# Altium PCB 20K Control Board V1.1.PcbDoc (part 20 of 24)
Units mm, origin at the board's own origin, x right, y up, seen from the top; angles counter-clockwise.
Board outline 132 x 260 mm, 4 copper layers (Top Layer, GND, VCC, Bottom Layer); 1384 components, 779 nets, 4515 pads, 1774 vias.
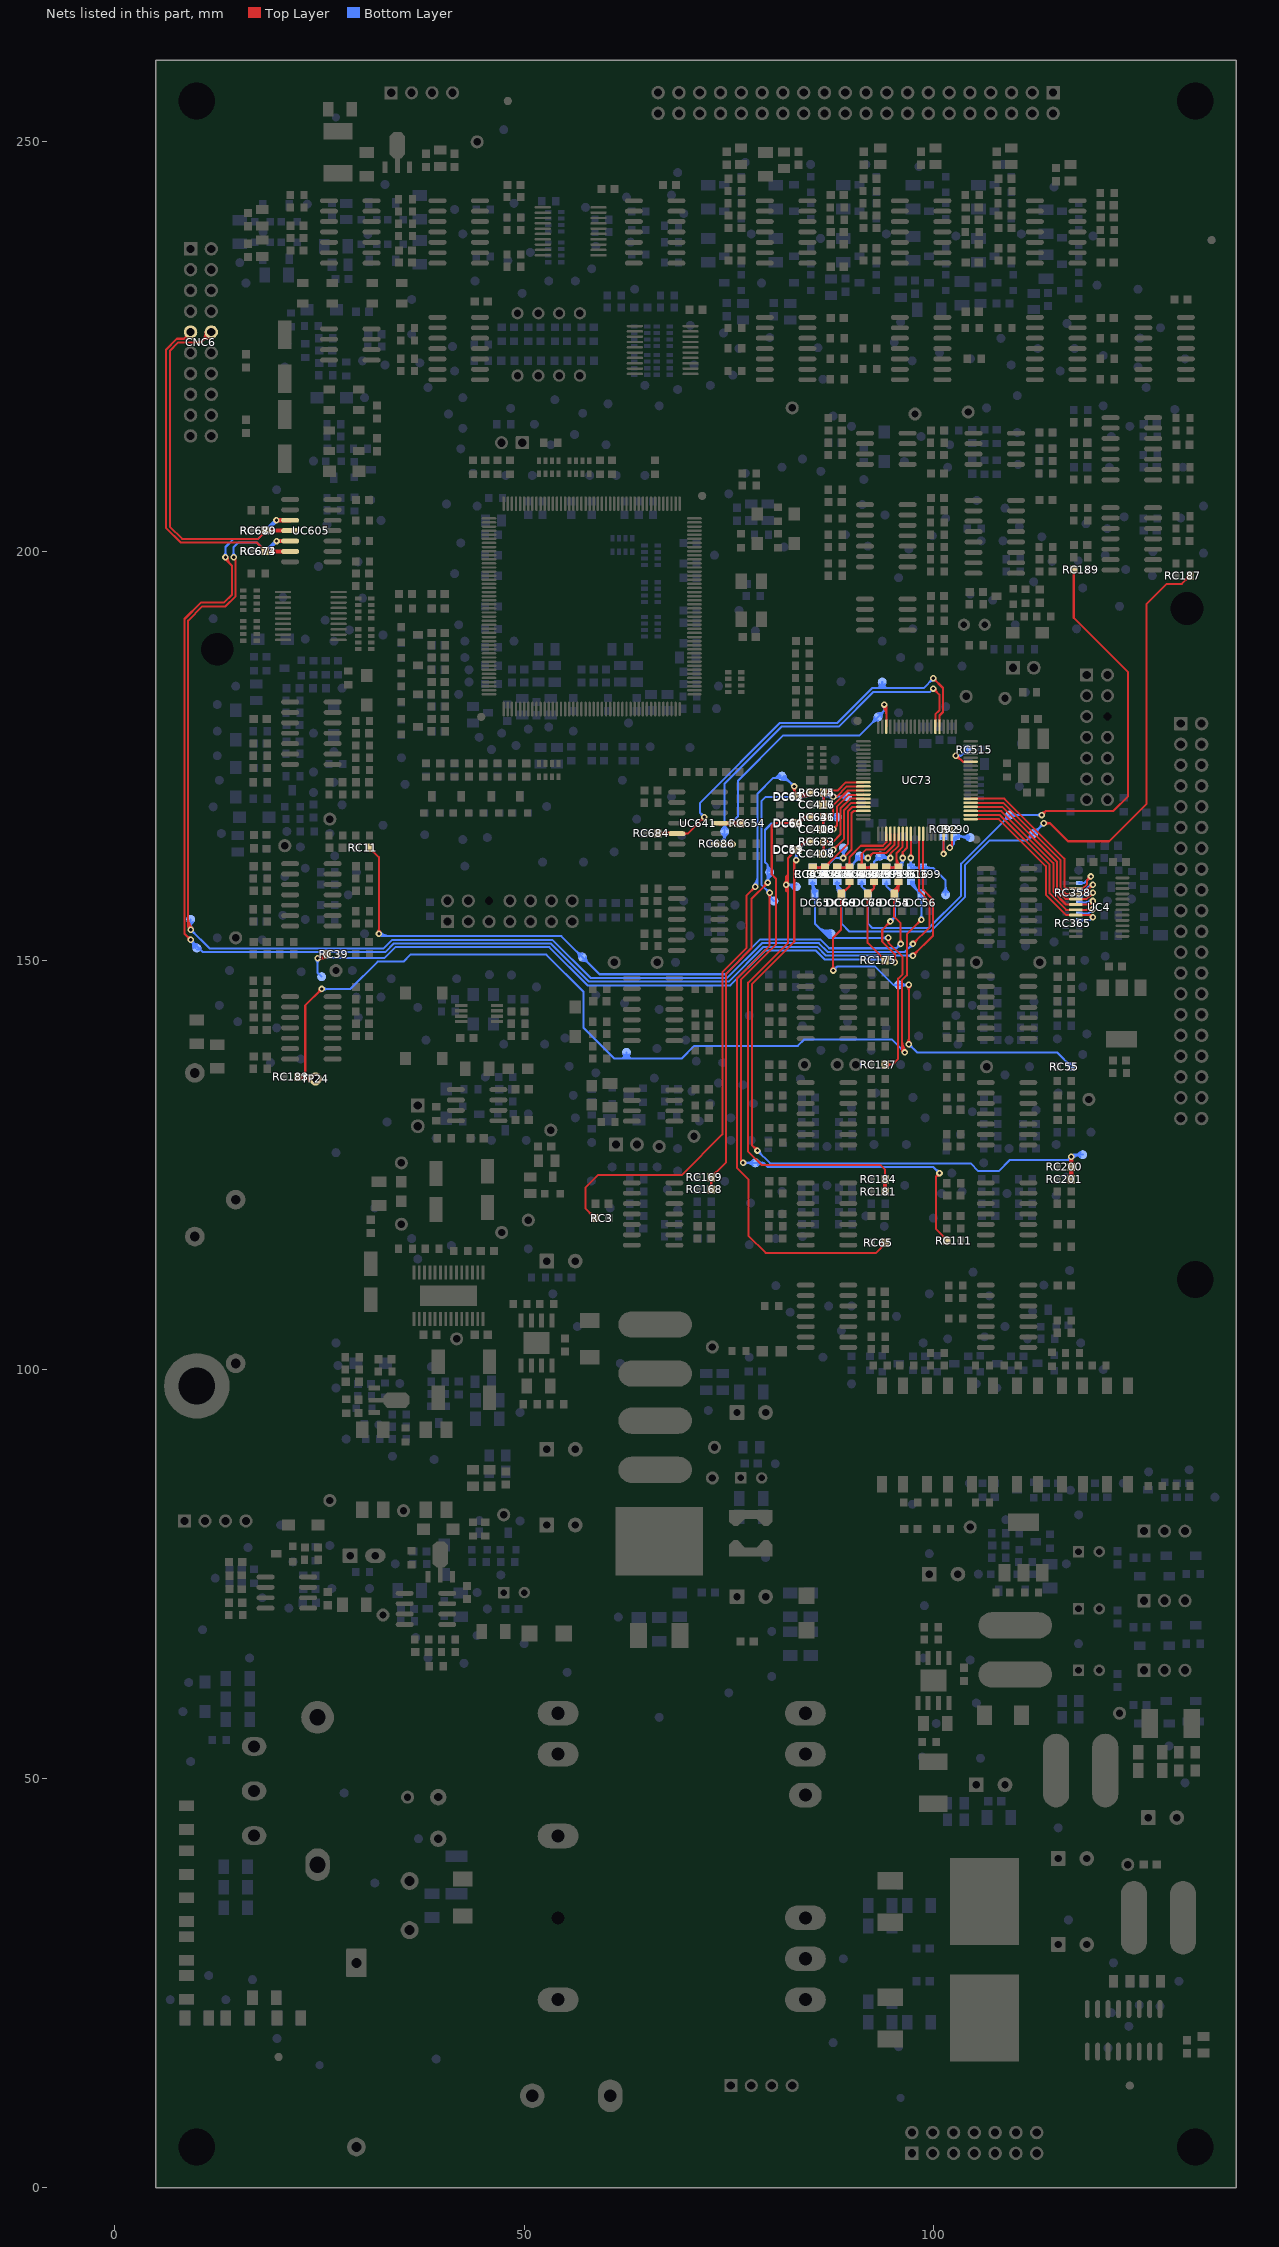
[diagram p22: the nets of this part, all layers, seen from the top]

## Via types
v1: diameter 0.8, hole 0.4, Top Layer to Bottom Layer, tented both sides, 1354 vias
v2: diameter 1.2, hole 0.7, Top Layer to Bottom Layer, 261 vias
v3: diameter 0.8, hole 0.4, Top Layer to Bottom Layer, 58 vias
v4: diameter 1.2, hole 0.7, Top Layer to Bottom Layer, tented top, 58 vias
v5: diameter 0.8, hole 0.4, Top Layer to Bottom Layer, tented top, 22 vias
v6: diameter 1.2, hole 0.7, Top Layer to Bottom Layer, tented both sides, 13 vias
v7: diameter 1.2, hole 0.7, Top Layer to Bottom Layer, tented bottom, 8 vias

## Nets (pads, with @x,y where several pads share a name; then routed paths per layer and width w, separated by ;. In a path a pad name is that pad's centre, name@x,y a point inside that pad or via, vN(x,y) a via of type N, cw(c..) or ccw(c..) an arc to the next point about the centre after c; other vN are vias at no path point) (continued)
S.DCI-R.AD: CC421.2 RC655.2 UC73.17 | length 15.5
  Top Layer w0.25: CC421.2@85.25,161.35 86.7,161.35 89.55,164.2 89.55,168.186 90.114,168.75 UC73.17@91.45,168.75 ; CC421.2@85.515,161.035 cw(c86.276,160.274) RC655.2@86.276,161.35 ; CC421.2@85.515,161.565 ccw(c86.035,162.085) 86.035,161.35 ; RC655.2@86.47,161.12 ccw(c85.915,160.565) 85.915,161.35 ccw(c85.915,162.135) RC655.2@86.47,161.58 ; RC655.2@86.8,161.675 ccw(c86.8,162.218) 87.184,161.834 ; RC655.2@87.125,161.35 cw(c88.151,161.35) 87.426,162.076
S.DCI-S: DC65.3 pad.ICT@87.5,153.25 RC137.1 RC656.1 | length 45.3
  Top Layer w0.25: RC137.1@94.1,137.35 RC137.1@94.1,137.25 95,137.25 95.7,137.95 95.7,147.75 96.25,148.3 96.25,150.421 94.5,152.171 ; v1@94.326,152.537 cw(c94.028,152.171) 94.5,152.171 ; RC137.1@94.33,137.02 cw(c94.885,136.465) 94.885,137.25 cw(c94.885,138.035) RC137.1@94.33,137.48 ; v1(94.5,152.75) 94.5,152.171 ; v1@94.674,152.537 ccw(c94.972,152.171) 94.5,152.171
  Bottom Layer w0.25: RC656.1@85.02,159.42 cw(c84.465,158.865) 85.25,158.865 cw(c86.035,158.865) RC656.1@85.48,159.42 ; 85.25,159.066 ccw(c86.351,159.066) DC65.3@85.592,158.269 ; DC65.3@85.3,157.619 cw(c84.733,157.052) 85.535,157.052 cw(c86.337,157.052) DC65.3@85.77,157.619 ; DC65.3@85.764,158.45 cw(c86.907,159.65) RC656.1@85.25,159.65 85.25,158.317 DC65.3@85.535,158.032 85.535,154.465 87.25,152.75 v1(94.5,152.75) ; 85.91,154.09 ccw(c87.04,155.22) pad.ICT@87.403,153.664 ; 86.228,153.772 ccw(c87.16,154.705) pad.ICT@87.46,153.42 ; 86.546,153.454 ccw(c87.281,154.189) pad.ICT@87.517,153.177 ; 86.864,153.136 ccw(c87.401,153.673) pad.ICT@87.574,152.934 ; v1@94.306,152.556 ccw(c93.836,152.086) 93.836,152.75 ccw(c93.836,153.414) v1@94.306,152.944
S.DCI-S.AD: CC422.2 pad.ICT@89,163.75 RC656.2 UC73.18 | length 20.7
  Top Layer w0.25: v1(89,162.5) 90,163.5 90,168 90.25,168.25 UC73.18@91.45,168.25
  Bottom Layer w0.25: RC656.2@85.3,161.3 CC422.2@86.75,161.3 87.95,162.5 v1(89,162.5) pad.ICT@89,163.75 ; RC656.2@85.53,161.12 cw(c85.964,160.686) 85.964,161.3 ; RC656.2@85.53,161.58 ccw(c86.205,162.255) 86.205,161.3 ; CC422.2@86.485,161.035 ccw(c85.845,160.395) 85.845,161.3 ccw(c85.845,162.205) CC422.2@86.485,161.565 ; CC422.2@86.75,161.675 ccw(c86.75,162.58) 87.39,161.94 ccw(c88.03,161.3) CC422.2@87.125,161.3 ; pad.ICT@88.699,163.449 cw(c87.974,162.724) 89,162.724 cw(c90.026,162.724) pad.ICT@89.301,163.449 ; v1@88.806,162.306 ccw(c88.336,161.836) 88.336,162.5 ccw(c88.336,163.164) 88.806,162.694 ccw(c88.336,163.164) 89,163.164 ccw(c89.664,163.164) v1@89.194,162.694
S.DCI-T: DC66.3 pad.ICT@95.75,147 RC55.1 RC657.1 | length 63.2
  Top Layer w0.25: v1@87.556,148.944 ccw(c87.086,149.414) 87.75,149.414 ccw(c88.414,149.414) v1@87.944,148.944 ; v1(87.75,148.75) 87.75,152.785 88.715,153.75 DC66.3@88.715,158.032 89.75,159.067 ; DC66.3@88.48,157.619 cw(c87.913,157.052) 88.715,157.052 cw(c89.517,157.052) DC66.3@88.95,157.619 ; DC66.3@88.715,158.292 ccw(c88.715,158.92) DC66.3@89.159,158.476 ; DC66.3@88.715,158.542 ccw(c88.715,159.773) 89.586,158.903 ; DC66.3@89.047,158.21 cw(c89.42,158.21) DC66.3@89.157,158.473 ; RC657.1@89.579,159.374 cw(c89.389,159.067) 89.75,159.067 ; RC657.1@89.75,159.65 89.75,159.067 ; RC657.1@89.921,159.374 ccw(c90.111,159.067) 89.75,159.067 ; v1@96.806,139.944 ccw(c96.336,140.414) 97,140.414 ccw(c97.664,140.414) v1@97.194,139.944 ; v1@96.806,146.806 cw(c96.336,146.336) 97,146.336 cw(c97.664,146.336) v1@97.194,146.806 ; v1(97,139.75) v1(97,147)
  Bottom Layer w0.25: v1(87.75,148.75) 88.225,149.225 92.889,149.225 95.114,147 pad.ICT@95.75,147 v1(97,147) ; v1@87.75,149.025 ccw(c87.75,149.689) 88.219,149.219 ccw(c88.689,148.75) v1@88.025,148.75 ; pad.ICT@96.051,146.699 cw(c96.776,145.974) 96.776,147 cw(c96.776,148.026) pad.ICT@96.051,147.301 ; v1@96.806,146.806 ccw(c96.336,146.336) 96.336,147 ccw(c96.336,147.664) v1@96.806,147.194 ; v1@97,139.475 cw(c97,138.811) 97.469,139.281 cw(c97.939,139.75) v1@97.275,139.75 ; v1(97,139.75) 98,138.75 115.1,138.75 RC55.1@116.85,137 ; 116.21,137.64 ccw(c116.85,138.28) RC55.1@116.85,137.375 ; 116.331,137.519 cw(c115.861,137.05) RC55.1@116.525,137.05
S.DCI-T.AD: CC423.2 RC657.2 UC73.23 | length 13
  Top Layer w0.25: CC423.2@88.25,161.3 RC657.2@89.7,161.3 ; CC423.2@88.515,161.035 cw(c89.155,160.395) 89.155,161.3 cw(c89.155,162.205) CC423.2@88.515,161.565 ; 88.795,161.3 ccw(c88.795,162.255) RC657.2@89.47,161.58 ; 89.036,161.3 cw(c89.036,160.686) RC657.2@89.47,161.12 ; RC657.2@89.52,161.58 ccw(c88.965,162.135) 89.75,162.135 ccw(c90.535,162.135) RC657.2@89.98,161.58 ; RC657.2@89.7,161.35 RC657.2@89.7,161.3 ; UC73.23@94.25,165.45 94.25,164.412 93.838,164 92.75,164 91.136,164 89.75,162.614 RC657.2@89.75,161.35 RC657.2@89.7,161.3
S.DSP_RDY: pad.ICT@93.25,179.75 RC654.2 UC73.78 UC641.11 | length 41.2
  Top Layer w0.25: v1@93.806,181.056 cw(c92.733,179.983) 94.25,179.983 ; v1@93.982,181.232 cw(c93.336,180.586) 94.25,180.586 ; v1(94,181.25) 94.25,181 UC73.78@94.25,178.55
  Top Layer w0.5: UC641.11@73.85,166.75 76.15,166.75 RC654.2@76.4,166.5 ; RC654.2@76.259,166.609 ccw(c75.917,166.267) 75.917,166.75 ccw(c75.917,167.233) RC654.2@76.259,166.891
  Bottom Layer w0.25: v1(75.25,166.75) 76.125,167.625 76.125,171.963 81.612,177.45 90.95,177.45 94,180.5 v1(94,181.25) ; v1@75.25,167.025 ccw(c75.25,167.689) 75.719,167.219 ccw(c76.189,166.75) v1@75.525,166.75 ; pad.ICT@92.825,179.75 cw(c91.799,179.75) 92.524,179.024 cw(c93.25,178.299) pad.ICT@93.25,179.325 ; pad.ICT@93.25,180.175 ccw(c93.25,181.201) 93.976,180.476 ccw(c94.701,179.75) pad.ICT@93.675,179.75 ; v1@93.806,181.056 cw(c93.336,180.586) 94,180.586 cw(c94.664,180.586) v1@94.194,181.056
S.FAN.ST5: RC92.1 UC73.37 | length 8
  Top Layer w0.25: v1@101.056,163.194 ccw(c100.586,163.664) 101.25,163.664 ccw(c101.914,163.664) v1@101.444,163.194 ; v1(101.25,163) UC73.37@101.25,165.45
  Bottom Layer w0.25: RC92.1@101.02,164.92 cw(c100.465,164.365) 101.25,164.365 cw(c102.035,164.365) RC92.1@101.48,164.92 ; v1@101.056,163.194 ccw(c100.586,163.664) 101.25,163.664 ccw(c101.914,163.664) v1@101.444,163.194 ; v1(101.25,163) RC92.1@101.25,165.2
S.FAN.ST6: pad.ICT@104.5,165 RC90.1 UC73.39 | length 11.1
  Top Layer w0.25: v1(102,163.75) 102.25,164 UC73.39@102.25,165.45 UC73.39@102.25,165.435
  Bottom Layer w0.25: v1(102,163.75) 102.5,164.25 102.5,164.9 RC90.1@102.75,165.15 pad.ICT@104.4,165.15 ; v1@102,164.025 ccw(c102,164.689) 102.469,164.219 ccw(c102.939,163.75) v1@102.275,163.75 ; 102.5,164.228 cw(c103.247,164.228) RC90.1@102.866,164.87 ; 102.5,164.667 cw(c102.987,164.667) RC90.1@102.738,165.085 ; RC90.1@103.03,164.92 cw(c103.585,164.365) 103.585,165.15 cw(c103.585,165.935) RC90.1@103.03,165.38 ; RC90.1@103.112,165.15 cw(c103.112,163.612) pad.ICT@104.199,164.699 ; 103.715,165.15 cw(c103.715,164.215) pad.ICT@104.376,164.876 ; 103.836,165.15 ccw(c103.836,165.664) pad.ICT@104.199,165.301
S.GFCI: DC68.3 RC175.2 RC668.1 | length 16.1
  Top Layer w0.25: DC68.3@91.73,157.619 cw(c91.163,157.052) 91.965,157.052 cw(c92.767,157.052) DC68.3@92.2,157.619 ; DC68.3@91.972,158.292 ccw(c92.015,158.792) DC68.3@92.37,158.437 ; DC68.3@91.994,158.541 ccw(c92.075,159.492) 92.75,158.817 ; DC68.3@92.297,158.21 cw(c92.67,158.21) DC68.3@92.407,158.473 ; RC668.1@92.52,159.42 cw(c91.965,158.865) 92.75,158.865 cw(c93.535,158.865) RC668.1@92.98,159.42 ; RC668.1@92.75,159.65 92.75,158.817 ; 93.46,150.64 ccw(c94.1,151.28) RC175.2@94.1,150.375 ; 93.581,150.519 cw(c93.111,150.05) RC175.2@93.775,150.05 ; RC175.2@94.1,150 91.965,152.135 DC68.3@91.965,158.032 92.75,158.817
S.GFCI.AD: CC430.2 RC668.2 UC73.24 | length 12.5
  Top Layer w0.25: CC430.2@90.985,161.565 ccw(c90.345,162.205) 91.25,162.205 ccw(c92.155,162.205) 91.515,161.565 ccw(c92.035,162.085) 92.035,161.35 ; CC430.2@91.25,161.3 91.25,163 91.8,163.55 93.25,163.55 94.025,163.55 94.75,164.275 UC73.24@94.75,165.45 ; CC430.2@91.3,161.35 RC668.2@92.75,161.35 RC668.2@92.7,161.3 ; CC430.2@91.515,161.035 cw(c92.276,160.274) RC668.2@92.276,161.35 ; RC668.2@92.47,161.12 ccw(c91.915,160.565) 91.915,161.35 ccw(c91.915,162.135) RC668.2@92.47,161.58
S.RELAY-ISO1: pad.ICT@9.25,155 RC673.2 UC73.31 UC605.5 | length 180.2
  Top Layer w0.25: 8.95,154.535 ccw(c10.035,154.535) v1@9.268,153.768 ; 8.95,155.138 ccw(c10.638,155.138) v1@9.444,153.944 ; v1(9.25,153.75) 8.95,154.05 8.95,191.514 10.686,193.25 13.5,193.25 14.75,194.5 14.75,199 v1(14.5,199.25) ; v1(97.5,152) 99.5,154 99.5,157.227 98.25,158.477 UC73.31@98.25,165.45 ; v1@97.5,152.275 ccw(c97.5,152.939) 97.969,152.469 ccw(c98.439,152) v1@97.775,152
  Top Layer w0.5: v1(19.75,201.23) UC605.5@21.4,201.23
  Bottom Layer w0.25: pad.ICT@8.949,154.699 cw(c8.224,153.974) 9.25,153.974 cw(c10.276,153.974) pad.ICT@9.551,154.699 ; v1@9.056,153.944 ccw(c8.586,154.414) 9.25,154.414 ccw(c9.914,154.414) v1@9.444,153.944 ; v1@9.25,153.475 cw(c9.25,152.811) 9.719,153.281 cw(c10.189,153.75) v1@9.525,153.75 ; pad.ICT@9.25,155 v1(9.25,153.75) 11.55,151.45 32.827,151.45 33.877,152.5 53.455,152.5 58.105,147.85 74.804,147.85 79.054,152.1 85.991,152.1 87.066,151.025 96.525,151.025 v1(97.5,152) ; v1@14.306,199.444 ccw(c13.836,199.914) 14.5,199.914 ccw(c15.164,199.914) v1@14.694,199.444 ; v1(14.5,199.25) 14.5,200.5 15.05,201.05 17.3,201.05 RC673.2@18.35,200 ; 17.71,200.64 ccw(c18.35,201.28) RC673.2@18.35,200.375 ; 17.831,200.519 cw(c17.361,200.05) RC673.2@18.025,200.05 ; v1@97.225,152 cw(c96.561,152) 97.031,151.531 cw(c97.5,151.061) v1@97.5,151.725
  Bottom Layer w0.5: RC673.2@18.35,200.25 ccw(c18.35,201.264) 19.067,200.547 ; RC673.2@18.52,200 v1(19.75,201.23)
S.RELAY-ISO2: pad.ICT@10,151.5 RC679.2 UC73.32 UC605.3 | length 183.6
  Top Layer w0.25: v1@8.975,152.5 ccw(c8.311,152.5) 8.781,152.969 ccw(c9.25,153.439) v1@9.25,152.775 ; v1(9.25,152.5) 8.5,153.25 8.5,191.7 10.5,193.7 13.314,193.7 14.3,194.686 14.3,198.2 13.5,199 v1(13.5,199.25) ; v1@13.525,199.25 ccw(c14.189,199.25) 13.719,198.781 ; v1@13.775,199.25 ccw(c15.042,199.25) 14.146,198.354 ; v1(97.5,150.575) 99.95,153.025 99.95,157.414 98.75,158.614 UC73.32@98.75,165.45 ; v1@97.5,150.85 ccw(c97.5,151.514) 97.969,151.044 ccw(c98.439,150.575) v1@97.775,150.575
  Top Layer w0.5: v1(19.73,203.77) UC605.3@21.4,203.77
  Bottom Layer w0.25: v1@9.125,152.625 cw(c8.038,151.538) pad.ICT@9.575,151.508 ; v1@9.25,152.225 cw(c9.25,151.561) 9.719,152.031 cw(c10.189,152.5) v1@9.525,152.5 ; v1(9.25,152.5) 10.75,151 33.014,151 34.064,152.05 53.268,152.05 57.918,147.4 74.991,147.4 79.241,151.65 85.804,151.65 86.879,150.575 v1(97.5,150.575) ; 9.54,152.21 cw(c8.853,151.522) pad.ICT@9.825,151.503 ; 9.701,152.049 ccw(c10,152.347) pad.ICT@10,151.925 ; pad.ICT@10.043,151.33 cw(c10.176,150.8) 10.563,151.187 ; pad.ICT@10.425,151.5 ccw(c10.847,151.5) 10.549,151.201 ; v1@13.306,199.444 ccw(c12.836,199.914) 13.5,199.914 ccw(c14.164,199.914) v1@13.694,199.444 ; v1(13.5,199.25) 13.5,200.5 14.5,201.5 17.5,201.5 18.35,202.35 RC679.2@18.35,202.5 ; 17.724,201.724 ccw(c16.999,202.45) RC679.2@18.025,202.45 ; 17.966,201.966 cw(c18.35,201.582) RC679.2@18.35,202.125 ; v1@97.306,150.381 ccw(c96.836,149.911) 96.836,150.575 ccw(c96.836,151.239) v1@97.306,150.769
  Bottom Layer w0.5: RC679.2@18.35,202.75 ccw(c18.35,203.619) 18.965,203.005 ; RC679.2@18.46,202.5 v1(19.73,203.77)
S.RELAY-R1: RC365.6 UC4.8 UC73.41 | length 25.4
  Top Layer w0.25: UC73.41@104.55,167.25 108,167.25 113.75,161.5 113.75,158.004 116.229,155.525 UC4.8@117.4,155.525 ; 118.775,155.525 UC4.8@117.4,155.525 ; v1@119.225,155.525 UC4.8@117.4,155.525
  Bottom Layer w0.25: RC365.6@117.875,154.975 RC365.6@117.8,154.9 119.125,154.9 119.475,155.25 v1(119.5,155.25) ; RC365.6@118.038,154.812 cw(c118.252,154.598) 118.252,154.9 cw(c118.252,155.202) RC365.6@118.038,154.988
S.RELAY-R2: RC365.5 UC4.7 UC73.42 | length 26.5
  Top Layer w0.25: UC73.42@104.55,167.75 108.136,167.75 114.2,161.686 114.2,158.191 116.216,156.175 UC4.7@117.4,156.175 UC4.7@117.75,156.175 ; UC4.7@117.9,156.175 UC4.7@117.75,156.175 ; 118.655,156.175 ccw(c118.655,157.095) v1@119.306,156.444 ; 119.017,156.175 cw(c119.017,155.767) v1@119.306,156.056 ; v1(119.5,156.25) 119.425,156.175 UC4.7@117.75,156.175
  Bottom Layer w0.25: RC365.5@117.8,155.7 118.925,155.7 119.475,156.25 v1(119.5,156.25) ; RC365.5@118.038,155.612 cw(c118.252,155.398) 118.252,155.7 cw(c118.252,156.002) RC365.5@118.038,155.788 ; 118.987,155.763 cw(c119.5,155.25) v1@119.5,155.975 ; 119.048,155.824 ccw(c118.622,156.25) v1@119.225,156.25
S.RELAY-S1: RC358.8 UC4.6 UC73.43 | length 26.8
  Top Layer w0.25: UC73.43@104.55,168.25 104.575,168.225 108.298,168.225 114.65,161.873 114.65,158.377 116.202,156.825 UC4.6@117.4,156.825 119.05,156.825 119.475,157.25 v1(119.5,157.25) ; 119.037,156.812 cw(c119.436,156.414) v1@119.479,156.976 ; 119.048,156.824 ccw(c118.622,157.25) v1@119.225,157.25
  Bottom Layer w0.25: RC358.8@117.8,157.05 119.3,157.05 v1(119.5,157.25) ; RC358.8@118.038,156.962 cw(c118.252,156.748) 118.252,157.05 cw(c118.252,157.352) RC358.8@118.038,157.138 ; 118.353,157.05 ccw(c118.353,158.397) v1@119.306,157.444 ; 118.957,157.05 ccw(c118.957,157.793) v1@119.482,157.268
S.RELAY-S2: RC358.7 UC4.5 UC73.44 | length 28
  Top Layer w0.25: UC73.44@104.55,168.75 108.409,168.75 115.1,162.059 115.1,158.564 116.189,157.475 UC4.5@117.4,157.475 ; UC4.5@117.9,157.475 UC4.5@117.4,157.475 ; 118.987,157.763 cw(c119.5,157.25) v1@119.5,157.975 ; 119.048,157.824 ccw(c118.622,158.25) v1@119.225,158.25 ; v1(119.5,158.25) 119.475,158.25 118.7,157.475 UC4.5@117.4,157.475
  Bottom Layer w0.25: RC358.7@117.8,157.85 117.925,157.975 119.225,157.975 v1(119.5,158.25) ; RC358.7@118.038,157.762 cw(c118.554,157.246) 118.554,157.975 ; RC358.7@118.172,157.975 ccw(c118.172,159.578) v1@119.306,158.444 ; 118.776,157.975 ccw(c118.776,158.974) v1@119.482,158.268
S.RELAY-T1: RC358.6 UC4.4 UC73.45 | length 28.3
  Top Layer w0.25: UC73.45@104.55,169.25 108.546,169.25 115.55,162.246 115.55,158.75 116.175,158.125 UC4.4@117.4,158.125 ; UC4.4@117.9,158.125 UC4.4@117.4,158.125 ; UC4.4@118.075,158.175 ccw(c118.075,158.959) 118.629,158.405 ; 118.987,158.763 cw(c119.5,158.25) v1@119.5,158.975 ; 119.048,158.824 ccw(c118.622,159.25) v1@119.225,159.25 ; v1(119.5,159.25) 119.475,159.25 118.35,158.125 UC4.4@117.4,158.125
  Bottom Layer w0.25: RC358.6@117.8,158.65 118.65,158.65 v1@119.5,159.5 ; RC358.6@118.038,158.562 cw(c118.252,158.348) 118.252,158.65 cw(c118.252,158.952) RC358.6@118.038,158.738 ; 118.604,158.604 cw(c119.5,157.708) v1@119.5,158.975 ; 119.031,159.031 cw(c119.5,158.561) v1@119.5,159.225
S.RELAY-T2: RC358.5 UC4.3 UC73.46 | length 27.5
  Top Layer w0.25: UC73.46@104.55,169.75 108.682,169.75 116,162.432 116,159.002 116.227,158.775 UC4.3@117.4,158.775 ; UC4.3@117.9,158.775 UC4.3@117.4,158.775 ; UC4.3@118.075,158.825 ccw(c118.075,159.429) 118.502,159.002 ; v1@118.975,160.25 cw(c118.311,160.25) 118.781,159.781 cw(c119.25,159.311) v1@119.25,159.975 ; v1(119.25,160.25) 118.75,159.75 118.75,159.25 118.275,158.775 UC4.3@117.4,158.775
  Bottom Layer w0.25: RC358.5@117.8,159.45 118.45,159.45 v1(119.25,160.25) ; RC358.5@118.038,159.362 cw(c118.252,159.148) 118.252,159.45 cw(c118.252,159.752) RC358.5@118.038,159.538 ; v1@118.975,160.25 cw(c118.311,160.25) 118.781,159.781 cw(c119.25,159.311) v1@119.25,159.975
S.RL-PVISO1: CNC6.9 RC674.1 UC605.6 | length 46.8
  Top Layer w0.25: CNC6.9@9.23,226.18 9,225.95 8.75,225.95 8.41,225.95 ; CNC6.9@9.23,226.48 8.7,225.95 7.564,225.95 ; CNC6.9@9.23,226.77 8.41,225.95 ; 17.71,200.64 ccw(c18.35,201.28) RC674.1@18.35,200.375 ; 17.831,200.519 cw(c17.361,200.05) RC674.1@18.025,200.05 ; RC674.1@18.35,200 17.3,201.05 8.014,201.05 6.25,202.814 6.25,224.636 7.564,225.95 ; 7.564,225.95 8.41,225.95
  Top Layer w0.5: RC674.1@18.35,199.96 UC605.6@21.4,199.96 ; RC674.1@18.491,199.809 cw(c18.857,199.443) 18.857,199.96 ; RC674.1@18.491,200.091 ccw(c18.809,200.409) 18.809,199.96
S.RL-PVISO2: CNC6.10 RC680.2 UC605.4 | length 49.7
  Top Layer w0.25: CNC6.10@11.07,226.77 cw(c9.38,226.77) 10.575,225.575 cw(c11.77,224.38) CNC6.10@11.77,226.07 ; CNC6.10@11.32,226.77 cw(c10.234,226.77) 11.002,226.002 cw(c11.77,225.234) CNC6.10@11.77,226.32 ; CNC6.10@11.77,226.77 10.5,225.5 7.75,225.5 6.7,224.45 6.7,203 8.2,201.5 17.5,201.5 18.35,202.35 RC680.2@18.35,202.5 ; 17.724,201.724 ccw(c16.999,202.45) RC680.2@18.025,202.45 ; 17.966,201.966 cw(c18.35,201.582) RC680.2@18.35,202.125
  Top Layer w0.5: RC680.2@18.35,202.5 UC605.4@21.4,202.5 ; RC680.2@18.491,202.359 cw(c18.833,202.017) 18.833,202.5 cw(c18.833,202.983) RC680.2@18.491,202.641
S.SEL_C: pad.ICT@93.75,184 RC684.2 UC73.65 UC641.5 | length 61.3
  Top Layer w0.25: UC641.5@68.65,165.48 69.98,165.48 v1(72,167.5) ; UC641.5@69.524,165.356 cw(c69.822,165.058) 69.822,165.48 cw(c69.822,165.902) UC641.5@69.524,165.604 ; v1@71.725,167.5 cw(c71.061,167.5) 71.531,167.031 cw(c72,166.561) v1@72,167.225 ; v1@100,184.175 cw(c100,183.511) 100.469,183.981 cw(c100.939,184.45) v1@100.275,184.45 ; v1(100,184.45) 101.177,183.273 101.177,180.336 100.75,179.909 UC73.65@100.75,178.55
  Top Layer w0.5: RC684.2@66.37,165.48 UC641.5@68.65,165.48 UC641.5@67.73,165.48 ; RC684.2@66.491,165.641 ccw(c66.881,166.031) 66.881,165.48
  Bottom Layer w0.25: v1@71.725,167.5 ccw(c71.061,167.5) 71.531,167.969 ccw(c72,168.439) v1@72,167.775 ; v1(72,167.5) 71.5,168 71.5,169.247 81.253,179 88.25,179 92.5,183.25 93.25,183.25 ; 93.375,183.375 ccw(c93.169,183.581) pad.ICT@93.405,183.751 ; 93.451,183.451 cw(c93.75,183.153) 93.75,183.575 cw(c93.75,183.153) 94.049,183.451 ; pad.ICT@93.532,183.635 cw(c93.301,183.25) 93.75,183.25 ; pad.ICT@93.75,184 pad.ICT@93.75,183.75 ; pad.ICT@93.968,183.635 ccw(c94.199,183.25) 93.75,183.25 ; pad.ICT@94.095,183.751 ccw(c94.331,183.581) 94.125,183.375 ; v1@99.725,184.45 cw(c99.061,184.45) 99.531,183.981 cw(c100,183.511) v1@100,184.175 ; v1(100,184.45) 98.8,183.25 94.25,183.25 ; 93.25,183.25 93.5,183.25 ; 93.25,183.25 pad.ICT@93.75,183.75 ; 93.5,183.25 93.75,183.25 ; 93.5,183.25 pad.ICT@93.75,183.5 ; 93.75,183.25 94,183.25 ; 93.75,183.25 pad.ICT@93.75,183.5 ; pad.ICT@93.75,183.5 94,183.25 ; pad.ICT@93.75,183.5 pad.ICT@93.75,183.75 ; pad.ICT@93.75,183.75 94.25,183.25 ; 94,183.25 94.25,183.25
S.SEL_D: pad.ICT@74.5,165.75 RC686.2 UC73.66 UC641.9 | length 52.2
  Top Layer w0.25: v1@100,182.925 cw(c100,182.261) 100.469,182.731 cw(c100.939,183.2) v1@100.275,183.2 ; v1(100,183.2) 100.727,182.473 100.727,180.523 100.25,180.046 UC73.66@100.25,178.55
  Top Layer w0.5: UC641.9@73.85,164.21 v1(75.5,164.21)
  Bottom Layer w0.25: RC686.2@74.12,164.53 ccw(c73.203,165.447) pad.ICT@74.5,165.447 ; pad.ICT@74.199,165.449 cw(c73.474,164.724) 74.5,164.724 cw(c75.526,164.724) pad.ICT@74.801,165.449 ; pad.ICT@74.199,166.051 ccw(c73.474,166.776) 74.5,166.776 ccw(c75.526,166.776) pad.ICT@74.801,166.051 ; RC686.2@74.297,164.353 ccw(c73.807,164.843) 74.5,164.843 ; RC686.2@74.425,164.325 RC686.2@74.5,164.25 ; RC686.2@74.54,164.21 RC686.2@74.5,164.25 ; v1(100,183.2) 99.6,182.8 92.686,182.8 88.436,178.55 81.439,178.55 74.5,171.611 RC686.2@74.5,164.25
  Bottom Layer w0.5: RC686.2@74.491,164.059 cw(c74.857,163.693) 74.857,164.21 ; RC686.2@74.491,164.341 ccw(c74.809,164.659) 74.809,164.21 ; RC686.2@74.54,164.21 v1(75.5,164.21)
S.TEMP-BOOST/AMB: DC69.3 pad.ICT@112.25,165.5 RC187.1 RC666.1 | length 97.2
  Top Layer w0.25: v1(113.5,166.75) 114.25,166.75 116.45,164.55 121.482,164.55 126.05,169.118 126.05,193.55 128.5,196 130.35,196 RC187.1@131.35,197 ; v1@113.694,166.556 cw(c114.164,166.086) 114.164,166.75 cw(c114.164,167.414) v1@113.694,166.944 ; 130.71,196.36 cw(c131.35,195.72) RC187.1@131.35,196.625 ; 130.831,196.481 ccw(c130.361,196.95) RC187.1@131.025,196.95
  Bottom Layer w0.25: RC666.1@88.02,159.42 cw(c87.465,158.865) 88.25,158.865 cw(c89.035,158.865) RC666.1@88.48,159.42 ; 88.25,158.819 ccw(c89.108,158.819) DC69.3@88.706,158.062 ; RC666.1@88.25,159.235 ccw(c89.327,159.235) DC69.3@88.823,158.282 ; DC69.3@88.55,157.619 cw(c87.983,157.052) 88.785,157.052 cw(c89.587,157.052) DC69.3@89.02,157.619 ; DC69.3@88.785,158.032 88.785,154.465 89.75,153.5 99.636,153.5 103.85,157.714 103.85,161.623 106.877,164.65 111.4,164.65 v1(113.5,166.75) ; DC69.3@88.785,158.215 88.25,158.75 RC666.1@88.25,159.65 ccw(c89.547,159.65) DC69.3@88.94,158.503 ; pad.ICT@111.825,165.5 cw(c110.799,165.5) 111.524,164.774 cw(c112.25,164.049) pad.ICT@112.25,165.075 ; pad.ICT@112.25,165.925 ccw(c112.25,166.951) 112.976,166.226 ccw(c113.701,165.5) pad.ICT@112.675,165.5 ; v1@113.225,166.75 cw(c112.561,166.75) 113.031,166.281 cw(c113.5,165.811) v1@113.5,166.475
S.TEMP-BOOST/AMB.AD: CC428.2 pad.ICT@91,162.75 RC666.2 UC73.25 | length 19.3
  Top Layer w0.25: v1(92,162.5) 92.6,163.1 94.211,163.1 95.25,164.139 UC73.25@95.25,165.45 ; v1@92,162.775 ccw(c92,163.439) 92.469,162.969 ccw(c92.939,162.5) v1@92.275,162.5
  Bottom Layer w0.25: RC666.2@88.25,161.3 89.7,161.3 CC428.2@89.725,161.325 ; RC666.2@88.53,161.12 cw(c88.964,160.686) 88.964,161.3 ; RC666.2@88.53,161.58 ccw(c89.205,162.255) 89.205,161.3 ; CC428.2@89.485,161.035 ccw(c88.845,160.395) 88.845,161.3 ccw(c88.845,162.205) CC428.2@89.485,161.565 ; CC428.2@89.75,161.35 CC428.2@89.725,161.325 ; CC428.2@89.75,161.675 ccw(c89.75,162.46) 90.305,161.905 ; CC428.2@90.125,161.3 cw(c91.151,161.3) 90.426,162.026 ; CC428.2@90.168,161.768 ccw(c89.187,162.75) pad.ICT@90.575,162.75 ; 90.531,162.131 cw(c91,161.661) pad.ICT@91,162.325 ; 90.595,162.195 ccw(c90.04,162.75) pad.ICT@90.825,162.75 ; pad.ICT@91.162,162.815 ccw(c91.63,163.004) v1@91.63,162.5 ; pad.ICT@91.394,162.909 ccw(c92,163.153) v1(92,162.5) 90.9,162.5 CC428.2@89.725,161.325 ; v1@91.806,162.306 ccw(c91.336,161.836) 91.336,162.5 ccw(c91.336,163.164) v1@91.806,162.694
S.TEMP-INV: DC70.3 pad.ICT@109.341,167.75 RC189.2 RC667.1 | length 86.7
  Top Layer w0.25: v1(113.25,167.75) 113.75,168.25 122,168.25 123.798,170.048 123.798,185.202 117.15,191.85 RC189.2@117.15,197.75 ; v1@113.25,168.025 ccw(c113.25,168.689) 113.719,168.219 ccw(c114.189,167.75) v1@113.525,167.75 ; RC189.2@116.92,197.47 cw(c116.365,196.915) 117.15,196.915 cw(c117.935,196.915) RC189.2@117.38,197.47
  Bottom Layer w0.25: RC667.1@91.055,159.39 cw(c90.763,159) 91.25,159 ; RC667.1@91.25,159.65 91.25,159 ; RC667.1@91.445,159.39 ccw(c91.737,159) 91.25,159 ; 91.464,158.786 cw(c90.888,158.21) DC70.3@91.703,158.21 ; 91.477,158.773 ccw(c92.035,159.331) DC70.3@92.035,158.542 ; DC70.3@91.8,157.619 cw(c91.233,157.052) 92.035,157.052 cw(c92.837,157.052) DC70.3@92.27,157.619 ; DC70.3@92.035,158.032 92.035,154.465 92.55,153.95 99.45,153.95 103.4,157.9 103.4,161.809 pad.ICT@109.341,167.75 v1(113.25,167.75) ; DC70.3@92.035,158.215 91.25,159 ; pad.ICT@108.916,167.75 cw(c107.89,167.75) 108.615,167.024 cw(c109.341,166.299) pad.ICT@109.341,167.325 ; pad.ICT@109.641,167.449 cw(c110.367,166.724) 110.367,167.75 cw(c110.367,168.776) pad.ICT@109.641,168.051 ; v1@113.056,167.556 ccw(c112.586,167.086) 112.586,167.75 ccw(c112.586,168.414) v1@113.056,167.944
S.TEMP-INV.AD: CC429.2 pad.ICT@93.5,162.75 RC667.2 UC73.26 | length 20.2
  Top Layer w0.25: v1@94.602,162.732 ccw(c94.428,163.002) 94.75,163.002 ; v1(94.75,162.5) 94.75,163.003 ; v1@94.898,162.732 cw(c95.072,163.002) 94.75,163.002 ; UC73.26@95.75,165.45 95.75,164.003 94.75,163.003
  Bottom Layer w0.25: RC667.2@91.25,161.3 CC429.2@92.7,161.3 ; RC667.2@91.53,161.12 cw(c91.964,160.686) 91.964,161.3 ; RC667.2@91.53,161.58 ccw(c92.205,162.255) 92.205,161.3 ; CC429.2@92.485,161.035 ccw(c91.845,160.395) 91.845,161.3 ccw(c91.845,162.205) CC429.2@92.485,161.565 ; CC429.2@92.525,161.6 ccw(c92.188,162.05) 92.75,162.05 ; 92.725,162.025 cw(c93.451,161.299) pad.ICT@93.486,162.325 ; CC429.2@92.75,161.3 92.75,162.05 ; 92.81,162.11 ccw(c92.17,162.75) pad.ICT@93.075,162.75 ; CC429.2@92.975,161.6 cw(c93.312,162.05) 92.75,162.05 ; pad.ICT@93.95,162.5 v1(94.75,162.5) ; 92.75,162.05 93.2,162.5 v1(94.75,162.5) ; 94.086,162.5 ccw(c94.086,163.164) 94.556,162.694 cw(c94.086,163.164) 94.086,162.5 ; 94.086,162.5 cw(c94.086,161.836) 94.556,162.306 ccw(c94.086,161.836) 94.086,162.5 ; v1(94.75,162.5) cw(c94.75,163.57) 93.855,162.983 ccw(c94.75,163.57) v1(94.75,162.5) ; pad.ICT@93.646,162.846 ccw(c94.287,163.266) 94.287,162.5 cw(c94.287,163.266) pad.ICT@93.646,162.846
S.V-INV-R: DC60.3 pad.ICT@80,160.75 RC168.2 RC169.1 RC631.1 | length 65.1
  Top Layer w0.25: RC168.2@72.62,122.28 ccw(c72.065,122.835) 72.85,122.835 ccw(c73.635,122.835) RC168.2@73.08,122.28 ; RC169.1@72.62,123.22 cw(c72.065,122.665) 72.85,122.665 cw(c73.635,122.665) RC169.1@73.08,123.22 ; RC168.2@72.85,122 RC169.1@72.85,123.5 74.675,125.325 74.675,148.38 77.775,151.48 77.775,157.5 v1@79.75,159.475 ; RC169.1@72.85,123.875 ccw(c72.85,124.78) 73.49,124.14 ; RC169.1@73.175,123.55 cw(c73.839,123.55) 73.369,124.019 ; 79.263,158.987 ccw(c78.75,159.5) v1@79.475,159.5 ; 79.324,159.048 cw(c79.75,158.622) v1@79.75,159.225
  Bottom Layer w0.25: v1@79.556,159.694 ccw(c79.086,160.164) 79.75,160.164 ccw(c80.414,160.164) v1@79.944,159.694 ; v1@79.75,159.475 cw(c80.866,159.475) pad.ICT@80.239,160.398 ; v1(79.75,159.5) 79.75,161.675 ; 79.75,159.947 cw(c80.545,159.947) pad.ICT@80.098,160.605 ; 79.75,161.332 ccw(c80.187,161.332) pad.ICT@80.053,160.917 ; pad.ICT@80.13,161.155 cw(c80.296,161.675) 79.75,161.675 ; DC60.3@82.869,166.48 ccw(c82.302,165.913) 82.302,166.715 ccw(c82.302,167.517) DC60.3@82.869,166.95 ; DC60.3@83.282,166.715 80.215,166.715 79.425,165.925 79.425,162 79.75,161.675 ; DC60.3@83.46,167.047 ccw(c83.46,167.862) 84.036,167.286 ; DC60.3@83.465,166.715 84.25,167.5 ; DC60.3@83.792,166.715 cw(c84.581,166.715) 84.023,167.273 ; RC631.1@84.64,167.305 ccw(c84.25,167.013) 84.25,167.5 ; RC631.1@84.64,167.695 cw(c84.25,167.987) 84.25,167.5 ; RC631.1@84.9,167.5 84.25,167.5
S.V-INV-R.AD: CC406.2 pad.ICT@88.25,167.5 RC631.2 UC73.14 | length 20.5
  Top Layer w0.25: v1(87.75,166) 88.2,166.45 ; v1@87.758,166.275 ccw(c87.777,166.873) 88.2,166.45 ; v1@88.025,166.008 cw(c88.623,166.027) 88.2,166.45 ; 88.2,166.75 88.2,167.25 ; UC73.14@91.45,170.25 91.425,170.225 89.679,170.225 88.2,168.746 88.2,167.25 ; 88.2,166.45 88.2,167.25
  Bottom Layer w0.25: CC406.2@86.285,166.265 ccw(c85.645,166.905) 86.55,166.905 ccw(c87.455,166.905) 86.815,166.265 ccw(c87.455,166.905) 87.455,166 ccw(c87.455,165.095) CC406.2@86.815,165.735 ; RC631.2@86.37,167.22 cw(c85.936,166.786) 86.55,166.786 ; 86.55,166.545 cw(c87.505,166.545) RC631.2@86.83,167.22 ; RC631.2@86.55,167.45 CC406.2@86.55,166 v1(87.75,166) ; RC631.2@86.6,167.5 pad.ICT@88.25,167.5 ; RC631.2@86.83,167.27 cw(c87.385,166.715) 87.385,167.5 cw(c87.385,168.285) RC631.2@86.83,167.73 ; v1@87.556,165.806 ccw(c87.086,165.336) 87.086,166 ccw(c87.086,166.664) v1@87.556,166.194 ; pad.ICT@87.949,167.199 ccw(c87.224,166.474) 87.224,167.5 ccw(c87.224,168.526) pad.ICT@87.949,167.801
S.V-INV-S: DC59.3 pad.ICT@83.25,159 RC181.2 RC184.1 RC632.1 | length 84.1
  Top Layer w0.25: 80.25,125 81,125 ; v1@81.982,159.232 cw(c81.336,158.586) 82.25,158.586 ; v1@81.982,159.268 ccw(c81.336,159.914) 82.25,159.914 ; v1@82.194,159.056 ccw(c82.664,158.586) 82,158.586 ccw(c81.336,158.586) 81.806,159.056 cw(c80.733,157.983) 82.25,157.983 ; v1@82.194,159.444 cw(c82.664,159.914) 82,159.914 cw(c81.336,159.914) 81.806,159.444 ccw(c80.733,160.517) 82.25,160.517 ; 82.25,158.25 82,158.5 82,160.25 82.25,160.5 82.25,162.503 ; 82.411,162.664 ccw(c81.541,163.535) DC59.3@82.772,163.535 ; DC59.3@82.838,163.091 ccw(c82.394,163.535) DC59.3@83.022,163.535 ; DC59.3@82.841,163.093 cw(c83.104,162.83) DC59.3@83.104,163.203 ; DC59.3@83.46,163.867 ccw(c83.46,164.24) DC59.3@83.723,163.976 ; DC59.3@83.542,163.535 cw(c84.17,163.535) DC59.3@83.726,163.979 ; DC59.3@83.792,163.535 cw(c85.023,163.535) 84.153,164.405 ; RC632.1@84.641,164.304 ccw(c84.247,164.007) 84.247,164.5 ; RC632.1@84.641,164.696 cw(c84.247,164.993) 84.247,164.5 ; RC632.1@84.9,164.5 84.247,164.5 ; RC184.1@93.87,123.53 ccw(c93.315,124.085) 94.1,124.085 ccw(c94.885,124.085) RC184.1@94.33,123.53 ; RC184.1@94.1,123.25 94.1,124.4 93.5,125 81,125 ; 81,125 79,125 77.375,126.625 77.375,147.261 82.25,152.136 82.25,162.503 ; 82.25,162.503 DC59.3@83.282,163.535 84.247,164.5
  Top Layer w0.5: RC181.2@93.959,121.941 ccw(c93.617,122.283) 94.1,122.283 ccw(c94.583,122.283) RC181.2@94.241,121.941 ; RC184.1@93.959,123.059 cw(c93.617,122.717) 94.1,122.717 cw(c94.583,122.717) RC184.1@94.241,123.059 ; RC181.2@94.1,121.75 RC184.1@94.1,123.25
  Bottom Layer w0.25: v1@82.194,159.056 cw(c82.664,158.586) 82.664,159.25 cw(c82.664,159.914) v1@82.194,159.444 ; 82.463,159.25 cw(c82.463,158.484) pad.ICT@83.104,158.904 ; pad.ICT@82.895,158.767 ccw(c82,158.18) v1(82,159.25) pad.ICT@83.25,159.25
S.V-INV-S.AD: CC407.2 RC632.2 UC73.15 | length 14.2
  Top Layer w0.25: CC407.2@86.285,163.265 ccw(c85.524,164.026) RC632.2@86.6,164.026 ; RC632.2@86.37,164.22 cw(c85.815,163.665) 86.6,163.665 cw(c87.385,163.665) RC632.2@86.83,164.22 ; CC407.2@86.6,163.05 RC632.2@86.6,164.5 87.75,164.5 88.65,165.4 88.65,168.559 89.841,169.75 UC73.15@91.45,169.75 ; 86.6,163.785 ccw(c87.335,163.785) CC407.2@86.815,163.265 ; RC632.2@86.83,164.27 cw(c87.385,163.715) 87.385,164.5 cw(c87.385,165.285) RC632.2@86.83,164.73
S.V-INV-T: DC61.3 pad.ICT@118.25,126.25 RC200.2 RC201.1 RC633.1 | length 98
  Top Layer w0.25: v1@78.225,126.75 ccw(c77.561,126.75) 78.031,127.219 ccw(c78.5,127.689) v1@78.5,127.025 ; v1(78.5,126.75) 77.825,127.425 77.825,147.075 83,152.25 83,162 v1(83.25,162.25)
  Top Layer w0.5: RC201.1@116.709,123.441 ccw(c116.367,123.783) 116.85,123.783 ccw(c117.333,123.783) RC201.1@116.991,123.441 ; RC200.2@116.709,124.559 cw(c116.367,124.217) 116.85,124.217 cw(c117.333,124.217) RC200.2@116.991,124.559 ; RC200.2@116.709,124.941 ccw(c116.367,125.283) 116.85,125.283 ccw(c117.333,125.283) RC200.2@116.991,124.941 ; RC201.1@116.85,123.25 v1(116.85,126)
  Bottom Layer w0.25: v1@78.5,126.475 cw(c78.5,125.811) 78.969,126.281 cw(c79.439,126.75) v1@78.775,126.75 ; v1(78.5,126.75) 80.05,125.2 104.55,125.2 105.5,124.25 107.964,124.25 109.314,125.6 ; DC61.3@83.047,163.23 cw(c82.557,162.74) 83.25,162.74 ; v1@83.056,162.444 ccw(c82.586,162.914) 83.25,162.914 ccw(c83.914,162.914) v1@83.444,162.444 ; DC61.3@83.215,163.465 DC61.3@83.282,163.465 83.465,163.465 84.25,164.25 ; v1(83.25,162.25) DC61.3@83.25,163.43 ; v1@83.25,162.586 cw(c84.161,162.586) DC61.3@83.517,163.23 ; DC61.3@83.46,163.797 ccw(c83.46,164.612) 84.036,164.036 ; DC61.3@83.792,163.465 cw(c84.581,163.465) 84.023,164.023 ; RC633.1@84.582,164.518 cw(c84.25,164.59) 84.25,164.25 ; RC633.1@84.65,164.25 84.25,164.25 ; 109.064,125.35 109.314,125.6 ; 109.75,125.6 109.314,125.6 ; v1@116.868,125.982 cw(c117.514,125.336) 117.514,126.25 ; v1@117.044,125.806 cw(c118.117,124.733) pad.ICT@118.117,126.25 ; pad.ICT@117.949,125.949 ccw(c117.224,125.224) 117.224,126.25 ccw(c117.224,127.276) pad.ICT@117.949,126.551 ; pad.ICT@118.25,126.25 117.1,126.25 v1(116.85,126) 116.45,125.6 109.314,125.6
S.V-INV-T.AD: CC408.2 RC633.2 UC73.16 | length 19.1
  Top Layer w0.25: v1(87.75,163.5) 89.1,164.85 89.1,168.373 89.977,169.25 UC73.16@91.45,169.25 ; v1@87.75,163.775 ccw(c87.75,164.439) 88.219,163.969 ccw(c88.689,163.5) v1@88.025,163.5
  Bottom Layer w0.25: CC408.2@86.193,163.115 cw(c86.721,162.945) 86.721,163.5 ; CC408.2@86.285,163.265 ccw(c85.524,164.026) RC633.2@86.6,164.026 ; RC633.2@86.37,164.22 cw(c85.815,163.665) 86.6,163.665 cw(c87.385,163.665) RC633.2@86.83,164.22 ; CC408.2@86.431,163.038 cw(c87.064,162.835) 87.064,163.5 ; CC408.2@86.6,163.05 86.6,163.5 ; 86.6,163.785 ccw(c87.335,163.785) CC408.2@86.815,163.265 ; RC633.2@86.6,164.5 86.6,163.5 ; CC408.2@86.669,162.962 cw(c87.407,162.725) v1@87.407,163.5 ; CC408.2@86.907,162.885 cw(c87.75,162.615) v1(87.75,163.5) 86.6,163.5 ; v1@87.556,163.306 ccw(c87.086,162.836) 87.086,163.5 ccw(c87.086,164.164) v1@87.556,163.694
S.VGRIDR: DC63.3 pad.ICT@81.5,172.5 RC3.2 RC644.1 | length 93.5
  Top Layer w0.25: 58.01,119.14 ccw(c58.65,119.78) RC3.2@58.65,118.875 ; 58.131,119.019 cw(c57.661,118.55) RC3.2@58.325,118.55 ; RC3.2@58.65,118.5 57.5,119.65 57.5,122.25 59,123.75 69.25,123.75 74.225,128.725 74.225,148.566 77.15,151.491 77.15,157.9 v1(78.25,159) ; v1@77.975,159 cw(c77.311,159) 77.781,158.531 cw(c78.25,158.061) v1@78.25,158.725 ; v1@82.806,171.056 cw(c82.336,170.586) 83,170.586 ; DC63.3@82.869,170.27 ccw(c82.554,170.585) 83,170.585 ; DC63.3@83,170.317 v1(83,171.25) ; DC63.3@83,170.485 ccw(c83.554,170.485) DC63.3@83.162,170.093 ; v1@83,171.088 ccw(c84.158,171.088) DC63.3@83.339,170.27 ; v1@83.194,171.056 ccw(c83.664,170.586) 83,170.586 ; DC63.3@83.25,170.067 DC63.3@83.282,170.035 ; DC63.3@83.695,169.8 cw(c84.262,169.233) 84.262,170.035 cw(c84.262,170.837) DC63.3@83.695,170.27 ; DC63.3@83.829,170.035 ccw(c83.829,171.376) RC644.1@84.843,170.499 ; 84.375,170.035 ccw(c84.375,170.904) RC644.1@85.032,170.336 ; RC644.1@84.575,170.436 cw(c84.009,170.411) 84.41,170.01 cw(c84.732,169.688) RC644.1@84.83,170.133 ; RC644.1@84.654,170.662 cw(c83.282,171.848) DC63.3@83.282,170.035 ; RC644.1@84.9,170.5 84.435,170.035 DC63.3@83.282,170.035
  Bottom Layer w0.25: v1@78.056,159.194 ccw(c76.922,160.328) 78.525,160.328 ; v1@78.232,159.018 ccw(c77.526,159.724) 78.525,159.724 ; v1(78.25,159) 78.525,159.275 78.525,170.389 80.386,172.25 ; 80.799,172.25 ccw(c80.799,172.866) pad.ICT@81.345,172.581 ; pad.ICT@81.123,172.697 cw(c80.386,173.081) 80.386,172.25 ; pad.ICT@81.5,172.075 cw(c81.5,170.445) 82.652,171.598 ; pad.ICT@81.5,172.325 cw(c81.5,171.299) 82.226,172.024 ; pad.ICT@81.925,172.5 ccw(c82.347,172.5) 82.049,172.201 ; v1@82.725,171.25 ccw(c82.061,171.25) 82.531,171.719 ccw(c83,172.189) v1@83,171.525 ; v1(83,171.25) 81.75,172.5 81.5,172.25 80.386,172.25
S.VGRIDR.AD: CC416.2 RC644.2 UC73.11 | length 11
  Top Layer w0.25: CC416.2@86.285,169.265 ccw(c85.524,170.026) RC644.2@86.6,170.026 ; RC644.2@86.37,170.22 cw(c85.815,169.665) 86.6,169.665 cw(c87.385,169.665) RC644.2@86.83,170.22 ; CC416.2@86.6,169.05 RC644.2@86.6,170.5 ; 86.6,169.785 ccw(c87.335,169.785) CC416.2@86.815,169.265 ; RC644.2@86.653,170.497 cw(c87.264,169.886) 87.264,170.75 ; RC644.2@86.75,170.75 88.295,170.75 89.295,171.75 UC73.11@91.45,171.75 ; RC644.2@86.83,170.32 cw(c87.867,169.283) 87.867,170.75
S.VGRIDR.ZERO: RC515.1 UC73.55 | length 7.5
  Top Layer w0.25: v1@102.75,174.725 cw(c102.75,173.758) 103.434,174.442 ; v1(102.75,175) 102.875,175 103.625,174.25 UC73.55@104.55,174.25 ; v1@103.025,175 ccw(c103.386,175) 103.131,174.745 ; 103.459,174.416 ccw(c103.8,174.757) UC73.55@103.8,174.275 ; UC73.55@104.527,174.273 UC73.55@104.55,174.25 ; UC73.55@104.565,174.25 UC73.55@104.55,174.25
  Bottom Layer w0.25: v1(102.75,175) 103.4,175 ; v1@102.947,174.809 cw(c103.4,174.369) 103.4,175 ; v1@102.947,175.191 ccw(c103.4,175.631) 103.4,175 ; 103.51,175.11 cw(c104.15,174.47) RC515.1@104.15,175.375 ; 103.631,175.231 ccw(c103.161,175.7) RC515.1@103.825,175.7 ; RC515.1@104.15,175.75 103.4,175
S.VGRIDS: DC62.3 pad.ICT@80.5,157.25 RC65.2 RC645.1 | length 93.5
  Top Layer w0.25: v1@79.806,158.056 cw(c79.336,157.586) 80,157.586 cw(c80.664,157.586) v1@80.194,158.056 ; v1(80,158.25) 80,151.796 76.025,147.821 76.025,124.611 77.4,123.236 77.4,116.35 79.5,114.25 93,114.25 RC65.2@94.1,115.35 ; 93.474,114.724 ccw(c92.749,115.45) RC65.2@93.775,115.45 ; 93.716,114.966 cw(c94.1,114.582) RC65.2@94.1,115.125 ; RC65.2@94.025,115.425 RC65.2@94.1,115.5
  Bottom Layer w0.25: 79.487,158.737 ccw(c80,159.25) v1@80,158.525 ; 79.548,158.676 cw(c79.122,158.25) v1@79.725,158.25 ; v1@80.02,158.235 ccw(c80.337,157.984) 80.051,157.699 ; v1@80.216,158.08 ccw(c80.559,157.809) pad.ICT@80.25,157.5 ; pad.ICT@80.5,157.25 80,157.75 ; DC62.3@82.869,169.73 ccw(c82.302,169.163) 82.302,169.965 ccw(c82.302,170.767) DC62.3@82.869,170.2 ; DC62.3@83.695,169.73 cw(c84.262,169.163) 84.262,169.965 cw(c84.262,170.767) DC62.3@83.695,170.2 ; DC62.3@83.782,169.965 ccw(c83.782,171.287) RC645.1@84.84,170.495 ; 84.281,169.965 ccw(c84.281,170.913) RC645.1@85.04,170.345 ; RC645.1@84.64,170.645 cw(c83.282,171.661) DC62.3@83.282,169.965 ; RC645.1@84.9,170.5 84.365,169.965 DC62.3@83.282,169.965 ; 80,157.75 ccw(c79.683,157.75) 79.853,158.018 cw(c79.683,157.75) 80,157.75 ; 80,157.75 cw(c80.317,157.75) 80.147,158.018 ccw(c80.317,157.75) 80,157.75 ; 80,157.75 v1(80,158.25) 79.975,158.25 78.975,159.25 78.975,169.44 79.5,169.965 DC62.3@83.282,169.965
S.VGRIDS.AD: CC417.2 pad.ICT@89.5,170 RC645.2 UC73.12 | length 18.7
  Top Layer w0.25: v1(87.75,170) 88.182,170 ; v1@87.999,169.884 cw(c88.182,169.799) 88.182,170 ; v1@87.999,170.116 ccw(c88.182,170.201) 88.182,170 ; UC73.12@91.45,171.25 89.432,171.25 88.182,170
  Bottom Layer w0.25: RC645.2@86.206,170.29 ccw(c86.637,170.465) RC645.2@86.637,170 ; CC417.2@86.285,169.265 ccw(c85.645,169.905) 86.55,169.905 ccw(c87.455,169.905) CC417.2@86.815,169.265 ; RC645.2@86.37,170.22 cw(c85.936,169.786) 86.55,169.786 ; RC645.2@86.438,170.384 ccw(c87.008,170.615) RC645.2@87.008,170 ; CC417.2@86.55,169 RC645.2@86.55,170 ; 86.55,169.545 cw(c87.505,169.545) RC645.2@86.83,170.22 ; RC645.2@86.55,170.45 RC645.2@86.55,170 ; RC645.2@86.67,170.478 ccw(c87.379,170.765) v1@87.379,170 ; RC645.2@86.901,170.572 ccw(c87.75,170.916) v1(87.75,170) ; v1@87.556,169.806 ccw(c87.086,169.336) 87.086,170 ccw(c87.086,170.664) v1@87.556,170.194 ; v1@87.944,169.806 cw(c88.414,169.336) 88.414,170 cw(c88.414,170.664) v1@87.944,170.194 ; pad.ICT@89.199,169.699 ccw(c88.474,168.974) 88.474,170 ccw(c88.474,171.026) pad.ICT@89.199,170.301 ; pad.ICT@89.5,170 v1(87.75,170) ; RC645.2@86.55,170 v1(87.75,170)
S.VGRIDT: DC64.3 pad.ICT@78.25,125.25 RC111.2 RC646.1 | length 92.8
  Top Layer w0.25: v1(76.75,125.25) 76.475,125.525 76.475,147.634 80.75,151.909 80.75,160 80.25,160.5 80.25,166.5 80.535,166.785 DC64.3@83.282,166.785 83.535,166.785 84.25,167.5 ; DC64.3@82.869,166.55 ccw(c82.302,165.983) 82.302,166.785 ccw(c82.302,167.587) DC64.3@82.869,167.02 ; DC64.3@83.46,167.117 ccw(c83.46,168.1) 84.155,167.405 ; DC64.3@83.792,166.785 cw(c84.413,166.785) 83.974,167.224 ; RC646.1@84.64,167.305 ccw(c84.25,167.013) 84.25,167.5 ; RC646.1@84.64,167.695 cw(c84.25,167.987) 84.25,167.5 ; RC646.1@84.9,167.5 84.25,167.5 ; v1@100.475,123.993 cw(c99.87,123.976) 100.298,123.548 ; v1@100.743,123.725 ccw(c100.726,123.12) 100.298,123.548 ; v1(100.75,124) 100.298,123.548 ; 101.069,116.419 cw(c100.45,115.8) RC111.2@101.325,115.8 ; 101.159,116.328 ccw(c101.65,116.819) RC111.2@101.65,116.125 ; RC111.2@101.65,115.75 101.65,115.838 100.298,117.19 100.298,123.548
  Bottom Layer w0.25: v1(76.75,125.25) pad.ICT@78.25,125.25 79.25,125.25 ; v1@76.944,125.056 cw(c77.414,124.586) 77.414,125.25 cw(c77.414,125.914) v1@76.944,125.444 ; pad.ICT@77.949,124.949 ccw(c77.224,124.224) 77.224,125.25 ccw(c77.224,126.276) pad.ICT@77.949,125.551 ; pad.ICT@78.556,124.955 cw(c79.25,124.286) 79.25,125.25 ; pad.ICT@78.556,125.545 ccw(c79.25,126.214) 79.25,125.25 ; v1@100.475,124 ccw(c99.811,124) 100.281,124.469 ccw(c100.75,124.939) v1@100.75,124.275 ; v1(100.75,124) 100,124.75 79.75,124.75 79.25,125.25
S.VGRIDT.AD: CC418.2 RC646.2 UC73.13 | length 12.3
  Top Layer w0.25: CC418.2@86.285,166.265 ccw(c85.645,166.905) 86.55,166.905 ccw(c87.455,166.905) CC418.2@86.815,166.265 ; RC646.2@86.37,167.22 cw(c85.936,166.786) 86.55,166.786 ; CC418.2@86.55,166 86.55,167.45 RC646.2@86.6,167.5 87.5,167.5 87.75,167.75 87.75,168.932 89.568,170.75 UC73.13@91.45,170.75 ; 86.55,166.545 cw(c87.505,166.545) RC646.2@86.83,167.22 ; RC646.2@86.83,167.27 cw(c87.385,166.715) 87.385,167.5 cw(c87.385,168.285) RC646.2@86.83,167.73
S.VISO-PV1: DC56.3 pad.ICT@62.5,138.75 RC183.2 RC616.1 TP24.1 | length 142.9
  Top Layer w0.25: RC183.2@22.415,135.737 ccw(c22.821,135.967) 22.821,135.5 ; RC183.2@22.633,135.86 ccw(c23.25,136.209) 23.25,135.5 ; 23.25,136 23,135.75 RC183.2@22.35,135.75 ; 23.5,135.5 23.25,135.75 RC183.2@22.35,135.75 ; TP24.1@23.936,135.13 ccw(c23.25,134.68) 23.25,135.5 ; TP24.1@23.936,135.87 cw(c23.25,136.32) 23.25,135.5 ; TP24.1@24.5,135.5 23.25,135.5 ; v1@24.975,146.5 cw(c24.311,146.5) 24.781,146.031 cw(c25.25,145.561) v1@25.25,146.225 ; v1(25.25,146.5) 23.25,144.5 23.25,135.5 ; 96.15,139.052 ccw(c96.802,139.052) v1@96.341,138.591 ; 96.15,139.655 ccw(c97.405,139.655) v1@96.518,138.768 ; 96.15,140.259 ccw(c98.009,140.259) v1@96.694,138.944 ; v1(96.5,138.75) 96.15,139.1 96.15,147.564 96.75,148.164 96.75,153.18 v1(98.535,154.965) ; v1@98.26,154.965 cw(c97.596,154.965) 98.065,154.496 cw(c98.535,154.026) v1@98.535,154.69 ; RC183.2@22.35,135.75 22.6,135.5 23.25,135.5
  Bottom Layer w0.25: v1(25.25,146.5) 28.75,146.5 32.1,149.85 35.25,149.85 36.1,150.7 52.709,150.7 57.25,146.159 57.25,141.75 61,138 62,138 ; v1@25.444,146.306 cw(c25.914,145.836) 25.914,146.5 cw(c25.914,147.164) v1@25.444,146.694 ; 62.125,138.125 ccw(c61.919,138.331) pad.ICT@62.155,138.501 ; 62.201,138.201 cw(c62.5,137.903) 62.5,138.325 cw(c62.5,137.903) 62.799,138.201 ; pad.ICT@62.282,138.385 cw(c62.051,138) 62.5,138 ; pad.ICT@62.5,138.75 pad.ICT@62.5,138.5 ; pad.ICT@62.718,138.385 ccw(c62.949,138) 62.5,138 ; pad.ICT@62.845,138.501 ccw(c63.081,138.331) 62.875,138.125 ; v1@96.225,138.75 ccw(c95.561,138.75) 96.031,139.219 ccw(c96.5,139.689) v1@96.5,139.025 ; v1(96.5,138.75) 94.95,140.3 84.186,140.3 83.436,139.55 70.8,139.55 69.25,138 63,138 ; RC616.1@97.25,159.65 97.25,159.317 DC56.3@98.535,158.032 v1(98.535,154.965) ; RC616.1@97.375,159.65 ccw(c98.481,159.65) 97.699,158.868 ; RC616.1@97.625,159.65 ccw(c99.335,159.65) DC56.3@98.126,158.441 ; 97.664,158.903 ccw(c98.535,159.773) DC56.3@98.535,158.542 ; DC56.3@98.091,158.476 ccw(c98.535,158.92) DC56.3@98.535,158.292 ; DC56.3@98.093,158.473 cw(c97.83,158.21) DC56.3@98.203,158.21 ; DC56.3@98.3,157.619 cw(c97.733,157.052) 98.535,157.052 cw(c99.337,157.052) DC56.3@98.77,157.619 ; v1@98.34,155.16 ccw(c97.871,155.629) 98.535,155.629 ccw(c99.199,155.629) v1@98.729,155.16 ; 62,138 62.25,138 ; 62,138 pad.ICT@62.5,138.5 ; 62.25,138 62.5,138 ; 62.25,138 pad.ICT@62.5,138.25 ; 62.5,138 62.75,138 ; 62.5,138 pad.ICT@62.5,138.25 ; pad.ICT@62.5,138.25 pad.ICT@62.5,138.5 ; pad.ICT@62.5,138.25 62.75,138 ; pad.ICT@62.5,138.5 63,138 ; 62.75,138 63,138
S.VISO-PV1.AD: CC399.2 pad.ICT@101.5,158 RC616.2 UC73.29 | length 19.7
  Top Layer w0.25: v1@97.056,162.694 ccw(c96.586,163.164) 97.25,163.164 ccw(c97.914,163.164) v1@97.444,162.694 ; v1(97.25,162.5) UC73.29@97.25,165.45
  Bottom Layer w0.25: RC616.2@97.02,161.58 ccw(c96.465,162.135) 97.25,162.135 ccw(c98.035,162.135) RC616.2@97.48,161.58 ; v1@97.056,162.306 cw(c96.586,161.836) 97.25,161.836 cw(c97.914,161.836) v1@97.444,162.306 ; RC616.2@97.25,161.3 CC399.2@98.75,161.3 99.95,161.3 101.5,159.75 pad.ICT@101.5,158 ; RC616.2@97.25,161.35 v1(97.25,162.5) ; RC616.2@97.53,161.12 cw(c97.964,160.686) 97.964,161.3 ; RC616.2@97.53,161.58 ccw(c98.205,162.255) 98.205,161.3 ; CC399.2@98.485,161.035 ccw(c97.845,160.395) 97.845,161.3 ccw(c97.845,162.205) CC399.2@98.485,161.565 ; CC399.2@99.015,161.035 cw(c99.655,160.395) 99.655,161.3 cw(c99.655,162.205) CC399.2@99.015,161.565 ; pad.ICT@101.199,158.301 ccw(c100.474,159.026) 101.5,159.026 ccw(c102.526,159.026) pad.ICT@101.801,158.301
S.VPV1: DC54.3 pad.ICT@57.121,150.379 RC11.2 RC596.1 | length 104.3
  Top Layer w0.25: RC11.2@31.1,163.375 cw(c31.1,162.47) 31.74,163.11 ; RC11.2@31.1,163.75 32.25,162.6 v1(32.25,153.25) ; RC11.2@31.425,163.7 ccw(c32.089,163.7) 31.619,163.231 ; v1@32.056,153.444 ccw(c31.586,153.914) 32.25,153.914 ccw(c32.914,153.914) v1@32.444,153.444 ; DC54.3@94.98,157.619 cw(c94.413,157.052) 95.215,157.052 cw(c96.017,157.052) DC54.3@95.45,157.619 ; DC54.3@95.06,158.503 ccw(c94.453,159.65) RC596.1@95.75,159.65 95.75,158.75 ; DC54.3@95.177,158.282 ccw(c94.673,159.235) RC596.1@95.75,159.235 ; DC54.3@95.225,158.542 ccw(c95.247,159.253) 95.75,158.75 ; DC54.3@95.294,158.062 ccw(c94.892,158.819) 95.75,158.819 ; RC596.1@95.52,159.42 cw(c94.965,158.865) 95.75,158.865 cw(c96.535,158.865) RC596.1@95.98,159.42 ; DC54.3@95.547,158.225 cw(c96.242,158.258) 95.75,158.75 ; v1@95.806,152.194 ccw(c95.336,152.664) 96,152.664 ccw(c96.664,152.664) v1@96.194,152.194 ; v1(96,152) 96,154.525 95.215,155.31 DC54.3@95.215,158.032 95.215,158.215 95.75,158.75
  Bottom Layer w0.25: v1(32.25,153.25) 32.55,152.95 54.55,152.95 59.2,148.3 74.618,148.3 78.868,152.55 86.177,152.55 87.252,151.475 95.475,151.475 v1(96,152) ; v1@32.268,153.268 ccw(c33.035,154.035) 33.035,152.95 ; v1@32.444,153.444 ccw(c33.638,154.638) 33.638,152.95 ; pad.ICT@56.696,150.379 ccw(c55.67,150.379) 56.395,151.105 ccw(c57.121,151.83) pad.ICT@57.121,150.804 ; pad.ICT@57.121,149.954 cw(c57.121,148.928) 57.846,149.654 cw(c58.572,150.379) pad.ICT@57.546,150.379 ; v1@95.725,152 cw(c95.061,152) 95.531,151.531 cw(c96,151.061) v1@96,151.725
S.VPV1.AD: CC394.2 RC596.2 UC73.27 | length 10.2
  Top Layer w0.25: CC394.2@94.25,161.3 94.3,161.35 RC596.2@95.75,161.35 ; CC394.2@94.515,161.035 cw(c95.276,160.274) RC596.2@95.276,161.35 ; CC394.2@94.515,161.565 ccw(c95.035,162.085) 95.035,161.35 ; RC596.2@95.47,161.12 ccw(c94.915,160.565) 94.915,161.35 ccw(c94.915,162.135) RC596.2@95.47,161.58 ; RC596.2@95.5,161.6 95.5,163.116 96.25,163.866 UC73.27@96.25,165.45 ; 95.5,162.014 ccw(c96.364,162.014) RC596.2@95.753,161.403 ; 95.5,162.617 ccw(c96.967,162.617) RC596.2@95.93,161.58
S.VPV2: DC55.3 pad.ICT@25.25,148 RC39.2 RC595.1 | length 104.5
  Top Layer w0.25: v1@24.947,150.059 cw(c25.4,149.619) 25.4,150.25 ; v1@24.947,150.441 ccw(c25.4,150.881) 25.4,150.25 ; v1@25.121,150.25 ccw(c25.121,151.015) RC39.2@25.83,150.728 ; 25.375,150.225 cw(c25.763,149.837) RC39.2@25.849,150.379 ; 25.381,150.231 ccw(c24.911,150.7) RC39.2@25.575,150.7 ; 25.492,150.25 ccw(c25.492,150.865) RC39.2@26.062,150.634 ; RC39.2@25.599,150.822 cw(c24.75,151.166) v1(24.75,150.25) 25.4,150.25 ; RC39.2@25.9,150.75 25.4,150.25 ; v1@94.475,154.75 cw(c93.811,154.75) 94.281,154.281 cw(c94.75,153.811) v1@94.75,154.475 ; v1(94.75,154.75) 93.75,153.75 93.75,152.285 95.285,150.75 v1(95.285,149.75) ; v1@95.09,149.944 ccw(c94.621,150.414) 95.285,150.414 ccw(c95.949,150.414) v1@95.479,149.944
  Bottom Layer w0.25: v1@24.556,150.056 cw(c24.086,149.586) 24.75,149.586 cw(c25.414,149.586) 24.944,150.056 cw(c25.535,149.465) 25.535,150.3 ; v1@24.944,150.444 ccw(c25.293,150.793) 25.293,150.3 ; pad.ICT@25.25,148 24.75,148.5 v1(24.75,150.25) 24.8,150.3 32.95,150.3 34.25,151.6 53.082,151.6 57.732,146.95 75.177,146.95 79.427,151.2 85.618,151.2 86.693,150.125 94.91,150.125 v1(95.285,149.75) ; RC595.1@94.079,159.374 cw(c93.889,159.067) 94.25,159.067 ; RC595.1@94.25,159.65 94.25,159.067 ; 94.414,158.903 ccw(c95.285,159.773) DC55.3@95.285,158.542 ; RC595.1@94.421,159.374 ccw(c94.611,159.067) 94.25,159.067 ; v1(94.75,154.75) 95.285,155.285 DC55.3@95.285,158.032 94.25,159.067 ; v1@94.75,155.025 ccw(c94.75,155.689) 95.219,155.219 ccw(c95.689,154.75) v1@95.025,154.75 ; DC55.3@94.841,158.476 ccw(c95.285,158.92) DC55.3@95.285,158.292 ; DC55.3@94.843,158.473 cw(c94.58,158.21) DC55.3@94.953,158.21 ; DC55.3@95.05,157.619 cw(c94.483,157.052) 95.285,157.052 cw(c96.087,157.052) DC55.3@95.52,157.619
S.VPV2.AD: CC395.2 RC595.2 UC73.28 | length 13.9
  Top Layer w0.25: v1@96.056,162.694 ccw(c95.586,163.164) 96.25,163.164 ccw(c96.914,163.164) v1@96.444,162.694 ; v1(96.25,162.5) 96.25,163.23 96.75,163.73 UC73.28@96.75,165.45
  Bottom Layer w0.25: RC595.2@94.25,161.3 CC395.2@95.75,161.3 ; RC595.2@94.53,161.12 cw(c94.964,160.686) 94.964,161.3 ; RC595.2@94.53,161.58 ccw(c95.205,162.255) 95.205,161.3 ; CC395.2@95.485,161.035 ccw(c94.845,160.395) 94.845,161.3 ccw(c94.845,162.205) CC395.2@95.485,161.565 ; CC395.2@95.635,161.657 ccw(c95.365,162.5) v1(96.25,162.5) 96.25,161.85 CC395.2@95.725,161.325 ; CC395.2@95.7,161.3 CC395.2@95.725,161.325 ; CC395.2@95.712,161.419 ccw(c95.475,162.157) v1@96.25,162.157 ; CC395.2@95.75,161.35 CC395.2@95.725,161.325 ; CC395.2@95.788,161.181 ccw(c95.585,161.814) 96.25,161.814 ; CC395.2@95.8,161.4 CC395.2@95.725,161.325 ; v1@96.059,162.303 cw(c95.619,161.85) 96.25,161.85 cw(c96.881,161.85) v1@96.441,162.303